# EAGLE board CT_schematic (EAGLE 7.6.0)

Size 100 x 80 mm. Coordinates in mm from the lower left corner, seen from the top.
Outline: 0,0 100,0 100,80 0,80 0,0
Copper layers (1*16): Top 0.035mm / dielectric 1.5mm / Bottom 0.035mm
Design rules "default": minimum track width 10mil, minimum drill 24mil, track to track 8mil, track to pad 8mil, pad to pad 8mil, via to via 8mil, smd to smd 8mil, copper to edge 40mil, drill to drill 8mil, minimum pad ring 10mil, minimum via ring 8mil, stop-mask expansion 4mil, vias tented up to drill 0mil, thermal gap 10mil

## Footprints (pad centres in the part's own frame; a part is rotated, then mirrored left to right if it is on the bottom)
C0603 = smd 0.8 x 0.8: 1 -0.762,0; 2 0.762,0
C0402 = smd 0.5 x 0.5: 1 -0.508,0; 2 0.508,0
C0805 = smd 1.2 x 1.3: 1 -1.016,0; 2 1.016,0
C1210 = smd 1.2 x 2.5: 1 -1.524,0; 2 1.524,0
EXV-9H = smd 3.505 x 1.676: 1 -2.857,0; 2 2.857,0
L0603 = smd 0.8 x 0.8: 1 -0.762,0; 2 0.762,0
PJ-037B_PACKAGE = drill 3.7 square: 1 12,0 | drill 3.2 square: 2 6,0
R0603 = smd 0.8 x 0.8: 1 -0.762,0; 2 0.762,0
LQFP48 = smd 0.3 x 1.2: 1 -2.75,-4.25; 2 -2.25,-4.25; 3 -1.75,-4.25; 4 -1.25,-4.25; 5 -0.75,-4.25; 6 -0.25,-4.25; 7 0.25,-4.25; 8 0.75,-4.25; 9 1.25,-4.25; 10 1.75,-4.25; 11 2.25,-4.25; 12 2.75,-4.25; 25 2.75,4.25; 26 2.25,4.25; 27 1.75,4.25; 28 1.25,4.25; 29 0.75,4.25; 30 0.25,4.25; 31 -0.25,4.25; 32 -0.75,4.25; 33 -1.25,4.25; 34 -1.75,4.25; 35 -2.25,4.25; 36 -2.75,4.25 | smd 1.2 x 0.3: 13 4.25,-2.75; 14 4.25,-2.25; 15 4.25,-1.75; 16 4.25,-1.25; 17 4.25,-0.75; 18 4.25,-0.25; 19 4.25,0.25; 20 4.25,0.75; 21 4.25,1.25; 22 4.25,1.75; 23 4.25,2.25; 24 4.25,2.75; 37 -4.25,2.75; 38 -4.25,2.25; 39 -4.25,1.75; 40 -4.25,1.25; 41 -4.25,0.75; 42 -4.25,0.25; 43 -4.25,-0.25; 44 -4.25,-0.75; 45 -4.25,-1.25; 46 -4.25,-1.75; 47 -4.25,-2.25; 48 -4.25,-2.75
SSOP-28 = smd 1.5 x 0.4: 1 -3.625,4.225; 2 -3.625,3.575; 3 -3.625,2.925; 4 -3.625,2.275; 5 -3.625,1.625; 6 -3.625,0.975; 7 -3.625,0.325; 8 -3.625,-0.325; 9 -3.625,-0.975; 10 -3.625,-1.625; 11 -3.625,-2.275; 12 -3.625,-2.925; 13 -3.625,-3.575; 14 -3.625,-4.225; 15 3.625,-4.225; 16 3.625,-3.575; 17 3.625,-2.925; 18 3.625,-2.275; 19 3.625,-1.625; 20 3.625,-0.975; 21 3.625,-0.325; 22 3.625,0.325; 23 3.625,0.975; 24 3.625,1.625; 25 3.625,2.275; 26 3.625,2.925; 27 3.625,3.575; 28 3.625,4.225
FCI_10118193-0001LF = smd 0.4 x 1.35: 1 -1.3,2.675; 2 -0.65,2.675; 3 0,2.675; 4 0.65,2.675; 5 1.3,2.675 | smd 1.6 x 1.4: 6 -3.2,2.45; 7 3.2,2.45 | smd 1.9 x 1.9: 8 -1.2,0; 9 1.2,0 | hole 0.5: -3.3,0; 3.3,0
SAMTEC_FTSH-105-01-L-DV-K = smd 0.762 x 2.794: 1 -2.54,-2.032; 2 -2.54,2.032; 3 -1.27,-2.032; 4 -1.27,2.032; 5 0,-2.032; 6 0,2.032; 7 1.27,-2.032; 8 1.27,2.032; 9 2.54,-2.032; 10 2.54,2.032
TSSOP20-I = smd 0.4 x 1.35: 1 -2.925,-2.875; 2 -2.275,-2.875; 3 -1.625,-2.875; 4 -0.975,-2.875; 5 -0.325,-2.875; 6 0.325,-2.875; 7 0.975,-2.875; 8 1.625,-2.875; 9 2.275,-2.875; 10 2.925,-2.875; 11 2.925,2.875; 12 2.275,2.875; 13 1.625,2.875; 14 0.975,2.875; 15 0.325,2.875; 16 -0.325,2.875; 17 -0.975,2.875; 18 -1.625,2.875; 19 -2.275,2.875; 20 -2.925,2.875
HTSS-105-01-G-D = drill 1 pad 1.8 square: 1 0,0 | drill 1 pad 1.8: 2 0,2.54; 3 2.54,0; 4 2.54,2.54; 5 5.08,0; 6 5.08,2.54; 7 7.62,0; 8 7.62,2.54; 9 10.16,0; 10 10.16,2.54
QFN-28 = smd 0.813 x 0.305: 1 -2.451,1.5; 2 -2.451,1; 3 -2.451,0.5; 4 -2.451,0; 5 -2.451,-0.5; 6 -2.451,-1; 7 -2.451,-1.5; 15 2.451,-1.5; 16 2.451,-1; 17 2.451,-0.5; 18 2.451,0; 19 2.451,0.5; 20 2.451,1; 21 2.451,1.5 | smd 0.305 x 0.813: 8 -1.5,-2.451; 9 -1,-2.451; 10 -0.5,-2.451; 11 0,-2.451; 12 0.5,-2.451; 13 1,-2.451; 14 1.5,-2.451; 22 1.5,2.451; 23 1,2.451; 24 0.5,2.451; 25 0,2.451; 26 -0.5,2.451; 27 -1,2.451; 28 -1.5,2.451 | smd 3.607 x 3.607: 29 0,0
SJ-43515TS-SMT-TR = smd 2.2 x 3: 1 0.6,-7.4; 4 3.4,-7.4 | smd 3 x 3: 2 12.8,-7.4; 5 17,-3 | smd 2 x 3: 3 5.3,0; 6 2.5,0 | drill 1.8: P$7 4.5,-3.69; P$8 11.54,-3.69
ABS07-32.768KHZ-7-T = smd 1.1 x 2.4: 1 -2.5,0; 2 0,0
ABLS-25.000MHZ-B2F-T = smd 5.6 x 2.8: 1 -3.81,0; 2 5.69,0
ABLS-12.288MHZ-B4-T = smd 5.6 x 2.8: 1 -3.81,0; 2 5.69,0
ASFL1 = smd 1.7 x 1.5: 1 -1.27,-1.1; 2 1.27,-1.1; 3 1.27,1.1; 4 -1.27,1.1
WSON-8 = smd 0.3 x 0.6: 1 -0.75,0; 2 0.05,0; 3 0.85,0; 4 1.65,0; 5 1.65,3.8; 6 0.85,3.8; 7 0.05,3.8; 8 -0.75,3.8 | smd 3 x 2.6: PAD 0.45,1.9
SON-6 = smd 0.55 x 0.3: 1 -0.355,0.5 | smd 0.52 x 0.3: 2 -0.37,0; 3 -0.37,-0.5; 4 0.37,-0.5; 5 0.37,0; 6 0.37,0.5
SW_4-1437565-2 = smd 1.4 x 2.1: 1 -2.23,4.55; 2 -2.23,-4.55; 3 2.23,4.55; 4 2.23,-4.55
LGM67K-G1J2-24-Z = smd 0.8 x 1.4: A -2,0; C 0,0
NC7SZ125M5X = smd 1.3 x 0.7: 1 -1.3,0.95; 2 -1.3,0; 3 -1.3,-0.95; 4 1.3,-0.95; 5 1.3,0.95

## Placement (x,y rotation side)
C1  1e-06  [C0603]  -15.24,72.39 0 top  (outside the outline)
C2  1e-07  [C0603]  -19.05,72.39 0 top  (outside the outline)
C3  1e-07  [C0603]  -22.86,72.39 0 top  (outside the outline)
C4  1e-07  [C0603]  -26.67,72.39 0 top  (outside the outline)
C5  1e-07  [C0603]  -30.48,72.39 0 top  (outside the outline)
C6  1e-07  [C0603]  -34.29,72.39 0 top  (outside the outline)
C7  4.7e-06  [C0603]  -80.01,67.31 0 top  (outside the outline)
C8  1e-08  [C0603]  -38.1,72.39 0 top  (outside the outline)
C9  1e-06  [C0603]  -41.91,72.39 0 top  (outside the outline)
C10  1e-11  [C0402]  -22.86,77.47 0 top  (outside the outline)
C11  1e-11  [C0402]  -26.67,77.47 0 top  (outside the outline)
C12  1e-11  [C0402]  -30.48,77.47 0 top  (outside the outline)
C13  1e-11  [C0402]  -34.29,77.47 0 top  (outside the outline)
C14  1e-07  [C0402]  -38.1,77.47 0 top  (outside the outline)
C15  4.7e-06  [C0805]  -46.99,60.96 0 top  (outside the outline)
C16  1e-07  [C0402]  -41.91,77.47 0 top  (outside the outline)
C17  1e-07  [C0402]  -45.72,77.47 0 top  (outside the outline)
C18  1e-07  [C0402]  -49.53,77.47 0 top  (outside the outline)
C19  1e-07  [C0402]  -53.34,77.47 0 top  (outside the outline)
C20  1e-07  [C0402]  -57.15,77.47 0 top  (outside the outline)
C21  1e-07  [C0402]  -60.96,77.47 0 top  (outside the outline)
C22  1e-07  [C0402]  -64.77,77.47 0 top  (outside the outline)
C23  1e-07  [C0402]  -68.58,77.47 0 top  (outside the outline)
C24  1e-07  [C0402]  -72.39,77.47 0 top  (outside the outline)
C25  2.2e-05  [C1210]  -77.47,53.34 0 top  (outside the outline)
C26  2.2e-05  [C1210]  -16.51,60.96 0 top  (outside the outline)
C27  1e-09  [C0402]  -76.2,77.47 0 top  (outside the outline)
C28  1e-09  [C0402]  -80.01,77.47 0 top  (outside the outline)
C29  1e-07  [C0402]  -15.24,82.55 0 top  (outside the outline)
C30  1e-07  [C0402]  -19.05,82.55 0 top  (outside the outline)
C31  1e-07  [C0402]  -22.86,82.55 0 top  (outside the outline)
C32  1e-07  [C0402]  -26.67,82.55 0 top  (outside the outline)
C33  1e-07  [C0402]  -30.48,82.55 0 top  (outside the outline)
C34  1e-05  [C0805]  -52.07,60.96 0 top  (outside the outline)
C35  1e-05  [C0805]  -57.15,60.96 0 top  (outside the outline)
C36  1e-05  [C0805]  -62.23,60.96 0 top  (outside the outline)
C37  1e-05  [C0805]  -67.31,60.96 0 top  (outside the outline)
C38  1e-05  [C0805]  -72.39,60.96 0 top  (outside the outline)
C39  2.2e-11  [C0402]  -15.24,77.47 0 top  (outside the outline)
C40  2.2e-11  [C0402]  -19.05,77.47 0 top  (outside the outline)
C41  1e-08  [C0402]  -34.29,82.55 0 top  (outside the outline)
C42  1e-08  [C0402]  -38.1,82.55 0 top  (outside the outline)
C43  1e-05  [C1210]  -22.86,60.96 0 top  (outside the outline)
C44  1e-05  [C1210]  -29.21,60.96 0 top  (outside the outline)
C45  1e-07  [C0402]  -41.91,82.55 0 top  (outside the outline)
C46  0.0001  [EXV-9H]  -45.72,45.72 0 top  (outside the outline)
C47  0.0001  [EXV-9H]  -57.15,45.72 0 top  (outside the outline)
C48  1e-08  [C0402]  -45.72,82.55 0 top  (outside the outline)
C49  1e-08  [C0402]  -49.53,82.55 0 top  (outside the outline)
F1  240.0  [L0603]  -45.72,72.39 0 top  (outside the outline)
J1  PJ-037B  [PJ-037B_PACKAGE]  -55.88,22.86 0 top  (outside the outline)
R1  10000.0  [R0603]  -20.32,67.31 0 top  (outside the outline)
R2  1000.0  [R0603]  -49.53,72.39 0 top  (outside the outline)
R3  1600.5  [R0603]  -53.34,72.39 0 top  (outside the outline)
R4  4700.0  [R0603]  -57.15,72.39 0 top  (outside the outline)
R5  10000.0  [R0603]  -25.4,67.31 0 top  (outside the outline)
R6  4700.0  [R0603]  -60.96,72.39 0 top  (outside the outline)
R7  10000.0  [R0603]  -30.48,67.31 0 top  (outside the outline)
R8  10000.0  [R0603]  -35.56,67.31 0 top  (outside the outline)
R9  10000.0  [R0603]  -40.64,67.31 0 top  (outside the outline)
R10  10000.0  [R0603]  -45.72,67.31 0 top  (outside the outline)
R11  10000.0  [R0603]  -50.8,67.31 0 top  (outside the outline)
R12  5.0  [R0603]  -64.77,72.39 0 top  (outside the outline)
R13  47000.0  [R0603]  -55.88,67.31 0 top  (outside the outline)
R14  47000.0  [R0603]  -60.96,67.31 0 top  (outside the outline)
R15  47000.0  [R0603]  -66.04,67.31 0 top  (outside the outline)
R16  680.0  [R0603]  -68.58,72.39 0 top  (outside the outline)
R17  100000.0  [R0603]  -77.47,60.96 0 top  (outside the outline)
R18  2231.0  [R0603]  -72.39,72.39 0 top  (outside the outline)
R19  1000.0  [R0603]  -76.2,72.39 0 top  (outside the outline)
R20  10000.0  [R0603]  -71.12,67.31 0 top  (outside the outline)
R21  10000.0  [R0603]  -76.2,67.31 0 top  (outside the outline)
R22  9100.0  [R0603]  -80.01,72.39 0 top  (outside the outline)
R23  680000.0  [R0603]  -82.55,60.96 0 top  (outside the outline)
R24  120000.0  [R0603]  -15.24,67.31 0 top  (outside the outline)
U1  STM32F373CCT6  [LQFP48]  -39.37,35.56 0 top  (outside the outline)
U2  FT232RL-REEL  [SSOP-28]  -20.32,7.62 0 top  (outside the outline)
U3  10118193-0001LF  [FCI_10118193-0001LF]  -35.56,44.45 0 top  (outside the outline)
U4  FTSH-105-01-L-DV-K  [SAMTEC_FTSH-105-01-L-DV-K]  -49.53,7.62 0 top  (outside the outline)
U5  SP3203ECY-L/TR  [TSSOP20-I]  -24.13,35.56 0 top  (outside the outline)
U6  HTSS-105-01-G-D  [HTSS-105-01-G-D]  -59.69,34.29 0 top  (outside the outline)
U7  WM8731CLSEFL  [QFN-28]  -69.85,53.34 0 top  (outside the outline)
U8  SJ-43515TS-SMT-TR  [SJ-43515TS-SMT-TR]  -82.55,10.16 0 top  (outside the outline)
U9  SJ-43515TS-SMT-TR  [SJ-43515TS-SMT-TR]  -39.37,24.13 0 top  (outside the outline)
U10  ABS07-32.768KHZ-7-T  [ABS07-32.768KHZ-7-T]  -48.26,54.61 0 top  (outside the outline)
U11  ABLS-25.000MHZ-B2F-T  [ABLS-25.000MHZ-B2F-T]  -76.2,45.72 0 top  (outside the outline)
U12  ABLS-12.288MHZ-B4-T  [ABLS-12.288MHZ-B4-T]  -25.4,54.61 0 top  (outside the outline)
U13  ASFL1-12MHZ-NCS  [ASFL1]  -26.67,45.72 0 top  (outside the outline)
U14  LP3878SDX-ADJ/NOPB  [WSON-8]  -80.01,33.02 0 top  (outside the outline)
U15  TPS3895ADRYR  [SON-6]  -52.07,81.28 0 top  (outside the outline)
U16  4-1437565-2  [SW_4-1437565-2]  -72.39,21.59 0 top  (outside the outline)
U17  Q65110A2395  [LGM67K-G1J2-24-Z]  -57.15,53.34 0 top  (outside the outline)
U18  nc7sz125m5x  [NC7SZ125M5X]  -34.29,60.96 0 top  (outside the outline)
U19  nc7sz125m5x  [NC7SZ125M5X]  -40.64,60.96 0 top  (outside the outline)

## Library data of the parts
C1-C49 F1 J1 R1-R24 U1-U19 = circuit_tree

## Nets
CLK_CRYSTAL_U1_3: C10.1 U1.3 U10.1
CLK_CRYSTAL_U1_4: C11.1 U1.4 U10.2
CLK_CRYSTAL_U1_5: C12.1 U1.5 U11.1
CLK_CRYSTAL_U1_6: C13.1 U1.6 U11.2
CLK_CRYSTAL_U7_1: C39.1 U7.1 U12.1
CLK_CRYSTAL_U7_2: C40.1 U7.2 U12.2
CLK_U2_27: U2.27 U13.3
GND: C1.2 C2.2 C3.2 C4.2 C5.2 C6.2 C7.2 C8.2 C9.2 C10.2 C11.2 C12.2 C13.2 C14.2 C15.2 C16.2 C17.2 C18.2 C19.2 C20.2 C23.2 C24.2 C28.2 C29.2 C30.2 C31.2 C32.2 C33.2 C34.2 C35.2 C36.2 C37.2 C38.2 C39.2 C40.2 C41.2 C42.2 C43.2 C44.2 C45.2 C46.2 C47.2 C48.2 C49.2 J1.2 R2.2 R5.2 R8.2 R12.2 R13.2 R14.2 R15.2 R19.2 R22.2 R24.2 U1.8 U1.23 U1.47 U2.7 U2.18 U2.21 U2.25 U2.26 U3.5 U3.6 U3.7 U3.8 U3.9 U4.3 U4.5 U5.18 U6.9 U7.4 U7.15 U7.19 U7.25 U7.26 U7.29 U8.1 U9.1 U13.2 U14.3 U14.PAD U15.2 U17.C U18.2 U18.3 U19.1 U19.3
NET_U1_7: R4.1 U1.7 U19.4
NET_U1_9: C8.1 C9.1 F1.1 U1.9 U1.24 U1.25
NET_U1_24: U1.24
NET_U1_44: R5.1 U1.44
NET_U1_45: R3.1 U1.45 U17.A
NET_U1_46: R1.1 U1.46 U16.3 U16.4
NET_U2_14: R7.1 U2.14
NET_U2_17: C16.1 U2.17
NET_U2_19: R8.1 U2.19
NET_U3_1: R6.1 U3.1
NET_U3_2: U2.16 U3.2
NET_U3_3: U2.15 U3.3
NET_U3_19: R6.2
NET_U4_9: R12.1 U4.9
NET_U5_1: C21.1 U5.1
NET_U5_2: C23.1 U5.2
NET_U5_3: C21.2 U5.3
NET_U5_4: C22.1 U5.4
NET_U5_5: C22.2 U5.5
NET_U5_6: C24.1 U5.6
NET_U5_20: U5.20
NET_U6_3: U5.14 U6.3
NET_U6_4: U5.13 U6.4
NET_U6_5: U5.17 U6.5
NET_U6_6: U5.16 U6.6
NET_U7_9: U7.9
NET_U7_20: C33.1 C38.1 U7.20
NET_U8_2: C26.1 R14.1 U8.2
NET_U8_5: C25.1 R13.1 U8.5
NET_U8_13: C25.2
NET_U8_14: C26.2
NET_U9_5: C27.1 C28.1 R15.1 R16.1 U9.5
NET_U9_21: R16.2
NET_U9_22: C27.2
NET_U14_1: C42.1 U14.1
NET_U14_6: R18.2 R19.1 U14.6
NET_U14_8: R17.1 U14.8
NET_U15_1: R21.1 R22.1 U15.1
NET_U15_3: R23.2 R24.1 U15.3
NET_U15_4: R20.1 U15.4 U18.4 U19.2
NET_U16_1: R2.1 U16.1 U16.2
PROC_I2S1_CK: U1.15 U7.7
PROC_I2S1_SD: U1.18 U7.8
PROC_I2S1_WS: U1.14 U7.9 U7.11
PROC_SYS_JTCK_SWCLK: R10.1 U1.37 U4.4
PROC_SYS_JTDO_TRACESWO: U1.39 U4.6
PROC_SYS_JTMS_SWDIO: R11.1 U1.34 U4.2
PROC_USART1_CTS: U1.32 U5.8
PROC_USART1_RTS: U1.33 U5.10
PROC_USART1_RX: U1.31 U5.11
PROC_USART1_TX: U1.30 U5.7
PROC_USART2_CTS: U1.10 U2.3
PROC_USART2_RTS: U1.11 U2.11
PROC_USART2_RX: U1.13 U2.1
PROC_USART2_TX: U1.12 U2.5
RST_OUT_U4_JTAG_RST_B: R9.1 U4.10 U18.1
VCC_S1_12V7: C43.1 C46.1 C47.1 J1.1 R17.2 U14.4
VCC_TIER1_3V3: C1.1 C2.1 C3.1 C4.1 C5.1 C6.1 C7.1 C14.1 C15.1 C17.1 C18.1 C19.1 C20.1 C29.1 C30.1 C31.1 C32.1 C34.1 C35.1 C36.1 C37.1 C41.1 C44.1 C45.1 C48.1 C49.1 F1.2 R1.2 R3.2 R4.2 R7.2 R9.2 R10.2 R11.2 R18.1 R20.2 R21.2 R23.1 U1.1 U1.17 U1.48 U2.4 U2.20 U4.1 U5.12 U5.19 U7.3 U7.5 U7.12 U7.18 U13.4 U14.5 U15.6 U18.5 U19.5

## Tracks (layer width: path | path; a pad name or v marks a point on that pad's centre or on a via)
CLK_CRYSTAL_U1_3  (2 unrouted)
CLK_CRYSTAL_U1_4  (2 unrouted)
CLK_CRYSTAL_U1_5  (2 unrouted)
CLK_CRYSTAL_U1_6  (2 unrouted)
CLK_CRYSTAL_U7_1  (2 unrouted)
CLK_CRYSTAL_U7_2  (2 unrouted)
CLK_U2_27  (1 unrouted)
GND  (88 unrouted)
NET_U1_7  (2 unrouted)
NET_U1_9  (5 unrouted)
NET_U1_44  (1 unrouted)
NET_U1_45  (2 unrouted)
NET_U1_46  (3 unrouted)
NET_U2_14  (1 unrouted)
NET_U2_17  (1 unrouted)
NET_U2_19  (1 unrouted)
NET_U3_1  (1 unrouted)
NET_U3_2  (1 unrouted)
NET_U3_3  (1 unrouted)
NET_U4_9  (1 unrouted)
NET_U5_1  (1 unrouted)
NET_U5_2  (1 unrouted)
NET_U5_3  (1 unrouted)
NET_U5_4  (1 unrouted)
NET_U5_5  (1 unrouted)
NET_U5_6  (1 unrouted)
NET_U6_3  (1 unrouted)
NET_U6_4  (1 unrouted)
NET_U6_5  (1 unrouted)
NET_U6_6  (1 unrouted)
NET_U7_20  (2 unrouted)
NET_U8_2  (2 unrouted)
NET_U8_5  (2 unrouted)
NET_U9_5  (4 unrouted)
NET_U14_1  (1 unrouted)
NET_U14_6  (2 unrouted)
NET_U14_8  (1 unrouted)
NET_U15_1  (2 unrouted)
NET_U15_3  (2 unrouted)
NET_U15_4  (3 unrouted)
NET_U16_1  (2 unrouted)
PROC_I2S1_CK  (1 unrouted)
PROC_I2S1_SD  (1 unrouted)
PROC_I2S1_WS  (2 unrouted)
PROC_SYS_JTCK_SWCLK  (2 unrouted)
PROC_SYS_JTDO_TRACESWO  (1 unrouted)
PROC_SYS_JTMS_SWDIO  (2 unrouted)
PROC_USART1_CTS  (1 unrouted)
PROC_USART1_RTS  (1 unrouted)
PROC_USART1_RX  (1 unrouted)
PROC_USART1_TX  (1 unrouted)
PROC_USART2_CTS  (1 unrouted)
PROC_USART2_RTS  (1 unrouted)
PROC_USART2_RX  (1 unrouted)
PROC_USART2_TX  (1 unrouted)
RST_OUT_U4_JTAG_RST_B  (2 unrouted)
VCC_S1_12V7  (5 unrouted)
VCC_TIER1_3V3  (54 unrouted)